# Altium PCB PCB1.PcbDoc
Units mm, origin at the board's own origin, x right, y up, seen from the top; angles counter-clockwise.
Board outline 4 x 12 mm, 2 copper layers (Top Layer, Bottom Layer); 2 components, 4 nets, 6 pads, 7 vias.
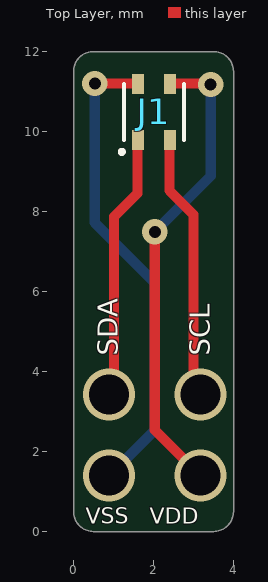
[diagram p0: Top Layer view]
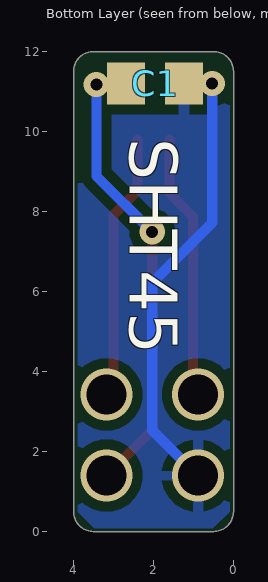
[diagram p1: Bottom Layer view, seen from below]

## Layer stack, top to bottom
Top Solder: solder mask 0.0102, Solder Resist, Dk 3.5
Top Layer: signal copper 0.0356
Dielectric 1: dielectric 0.32, FR-4, Dk 4.8
Bottom Layer: signal copper 0.0356
Bottom Solder: solder mask 0.0102, Solder Resist, Dk 3.5

## Board outline
0,0.5 0,11.5 cw(c0.5,11.5) 0.5,12 3.5,12 cw(c3.5,11.5) 4,11.5 4,0.5 cw(c3.5,0.5) 3.5,0 0.5,0 cw(c0.5,0.5)

## Design rules (kind name [scope] priority, off if disabled: settings)
Clearance [All] p1: gap=0.254 ignorepadtopadclearanceinfootprint=FALSE
PolygonConnect [All] p1: connectstyle=Relief reliefconductorwidth=0.254 reliefentries=4 polygonreliefangle="90 Angle" airgapwidth=0.254
RoutingVias [All] p1: holewidth=0.711 width=1.27 viastyle="Through Hole" minholewidth=0.711 minwidth=1.27 maxholewidth=0.711 maxwidth=1.27
SolderMaskExpansion [All] p1: expansion=0.102 istentingtop=FALSE
Width [All] p1: maxlimit=0.254 minlimit=0.254 preferedwidth=0.254
30 further rules are at their usual default settings.

## Components (designator, comment, footprint, x,y, rotation, side; value= is the part's Value field where it differs from the comment)
C1 "GRM188R71H103KA01D" CAPC1608X90X35ML10T15 1.962,11.201 r0 bottom
J1 "SHT45-AD1F-R2" SHT4X 2.007,10.49 r90 top

## Footprints (in the part's own frame and the unit in brackets; to place one, negate y for a bottom-side part, rotate by r counter-clockwise, add the part's x,y. Pads: shape width x height; smd on the part's side, far side on the other; paste and mask are expansions set on the pad)
CAPC1608X90X35ML10T15 [mm] "Chip Capacitor, 2-Leads, Body 1.7x0.9mm, IPC Low Density"
  rect 0.95x1.05 smd: 1(-0.725,0) 2(0.725,0)
  body extent -0.85,-0.45 0.85,0.45, height 0.9
SHT4X [mm]
  rect 0.5x0.3 smd: 1(-0.7,0.4) 2(-0.7,-0.4) 3(0.7,-0.4) 4(0.7,0.4)
  silkscreen extent -1.05,-0.75 0.7,0.85, body extent -0.75,-0.75 0.75,0.75, height 0.69

## Part data
C1: library part CMP-2100-03642-1, "Chip Capacitor, 10 nF, +/- 10%, 50 V, -55 to 125 degC, 0603 (1608 Metric), RoHS, Tape and Reel", Capacitance=10nF, Case Code (Imperial)=0603, Case Code (Metric)=1608, Dielectric=X7R, Dielectric Material=Ceramic, Insulation Resistance=10GR, Manufacturer=Murata, Max Operating Temperature=125degC, Min Operating Temperature=-55degC, Package Description="2-Pin Surface Mount Device, Body 1.6 x 0.8 mm", Package Quantity=1, Tolerance=10%, Voltage=50V, Case/Package=0603, Datasheet URL=http://search.murata.co.jp/Ceramy/image/img/A01X/G101/ENG/GRM188R71H103KA01-01.pdf, Datasheet Version=42401.0, Depth=0.8mm, Height=0.8mm, Lead Free=LeadFree, Length=1.6mm, Manufacturer URL=http://www.murata.com/, Material=Ceramic, Mount=SurfaceMount, Number of Pins=2, Package Reference=0603, Packaging=TapeandReel, REACH SVHC=Unknown, RoHSCompliant=True, Termination=SMD/SMT, Thickness=0.035inch, Voltage Rating=50V, Voltage Rating (DC)=50V, Width=0.031inch
J1: "Digital Relative Humidity Temperature Sensor, Â±1.0 %RH, Â±0.1 Â°C, Ultra-Low-Power, with filtermembrane", Package=Package, Availability="In Stock", Check_prices=https://www.snapeda.com/parts/SHT45-AD1F-R2/Sensirion/view-part/?ref=eda, MF=Sensirion, MP=SHT45-AD1F-R2, Price=None, Purchase-URL=https://pricing.snapeda.com/search/part/SHT45-AD1F-R2/?ref=eda, SnapEDA_Link=https://www.snapeda.com/parts/SHT45-AD1F-R2/Sensirion/view-part/?ref=snap

## Via types
v1: diameter 1.3, hole 1, Top Layer to Bottom Layer, 4 vias
v2: diameter 0.635, hole 0.3, Top Layer to Bottom Layer, 3 vias

## Nets (pads, with @x,y where several pads share a name; then routed paths per layer and width w, separated by ;. In a path a pad name is that pad's centre, name@x,y a point inside that pad or via, vN(x,y) a via of type N, cw(c..) or ccw(c..) an arc to the next point about the centre after c; other vN are vias at no path point)
Sense_SCL: J1.2 | length 6.7
  Top Layer w0.254: J1.2@2.4,9.8 2.4,8.522 3,7.922 3,3.604 v1(3.175,3.429)
Sense_SDA: J1.1 | length 6.7
  Top Layer w0.254: v1(0.889,3.429) 1.016,3.556 1.016,7.874 1.6,8.458 J1.1@1.6,9.8
VDD: C1.2 J1.3 | length 11.7
  Top Layer w0.254: v2@2.032,7.366 2.032,2.54 v1(3.175,1.397) ; J1.3@2.4,11.2 3.405,11.2 v2(3.429,11.176)
  Bottom Layer w0.254: v2(2.032,7.493) 3.429,8.89 v2(3.429,11.176)
VSS: C1.1 J1.4 | length 12
  Top Layer w0.254: v2(0.532,11.2) J1.4@1.6,11.2
  Bottom Layer w0.254: v2(0.532,11.2) 0.532,7.723 2.032,6.223 2.032,2.532 0.897,1.397 v1(0.889,1.397)

## Polygon pours and split planes (outlines as drawn)
VSS on Bottom Layer "NONET_L-01_P-001" (solid, remove dead copper, pour order 0): 0.1,11.6 0.4,11.9 3.5,11.9 3.9,11.5 3.9,0.5 3.476,0.076 0.524,0.076 0.1,0.5

## Silkscreen, mask and mechanical layers (free items; w line width, h text height)
Top Overlay:
  text "SDA" at 1.1,4.4 h0.5 r90
  text "SCL" at 3.4,4.4 h0.5 r90
  text "VSS   VDD" at 0.3,0.2 h0.4
Bottom Overlay:
  text "SHT45" at 2.597,9.836 h1.2 r90
Mechanical 1:
  the board outline again, w0.025